# EAGLE board mapleCUx_large_088-Stripped (EAGLE 7.3.0)
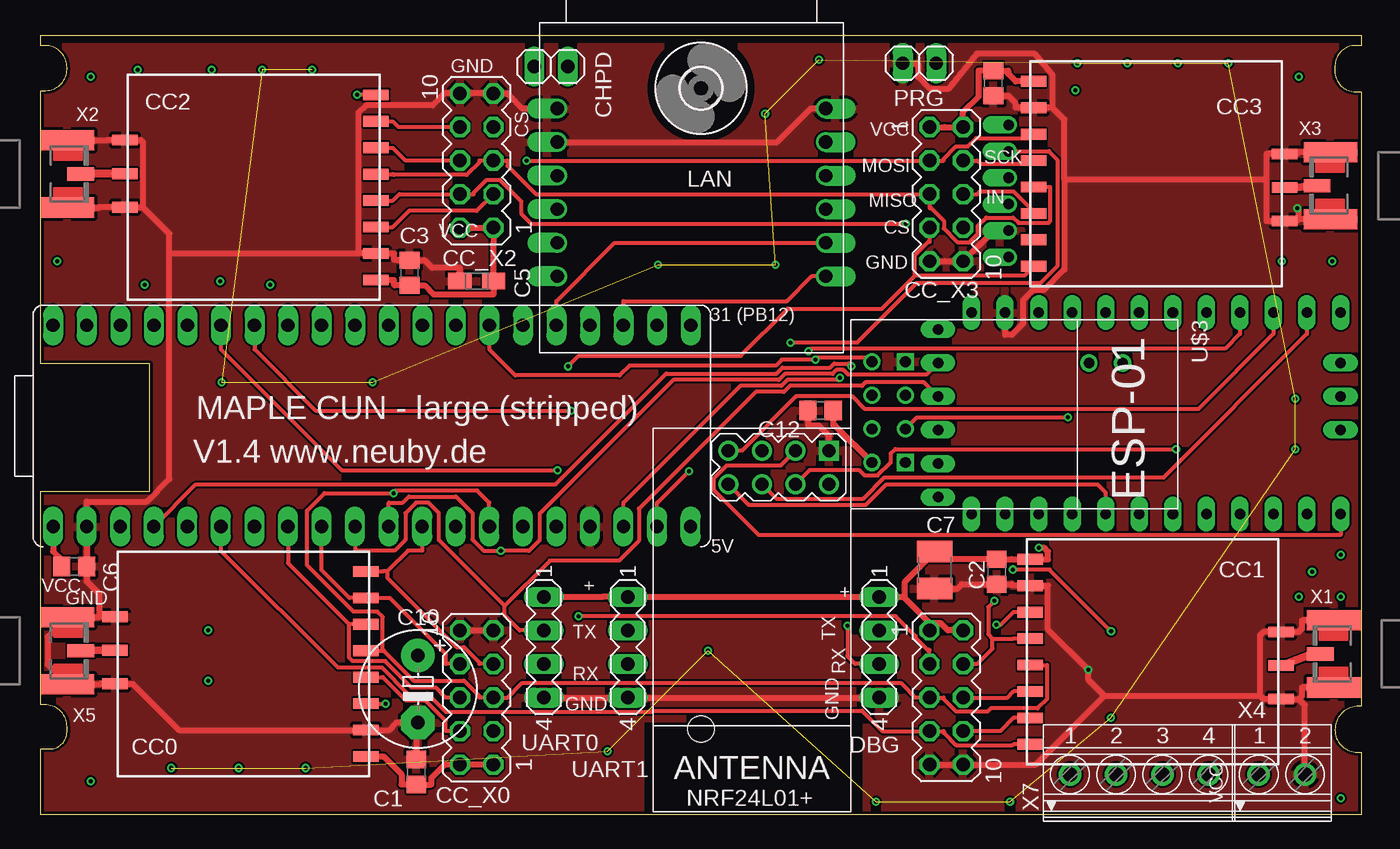
[diagram p0: board, top side]
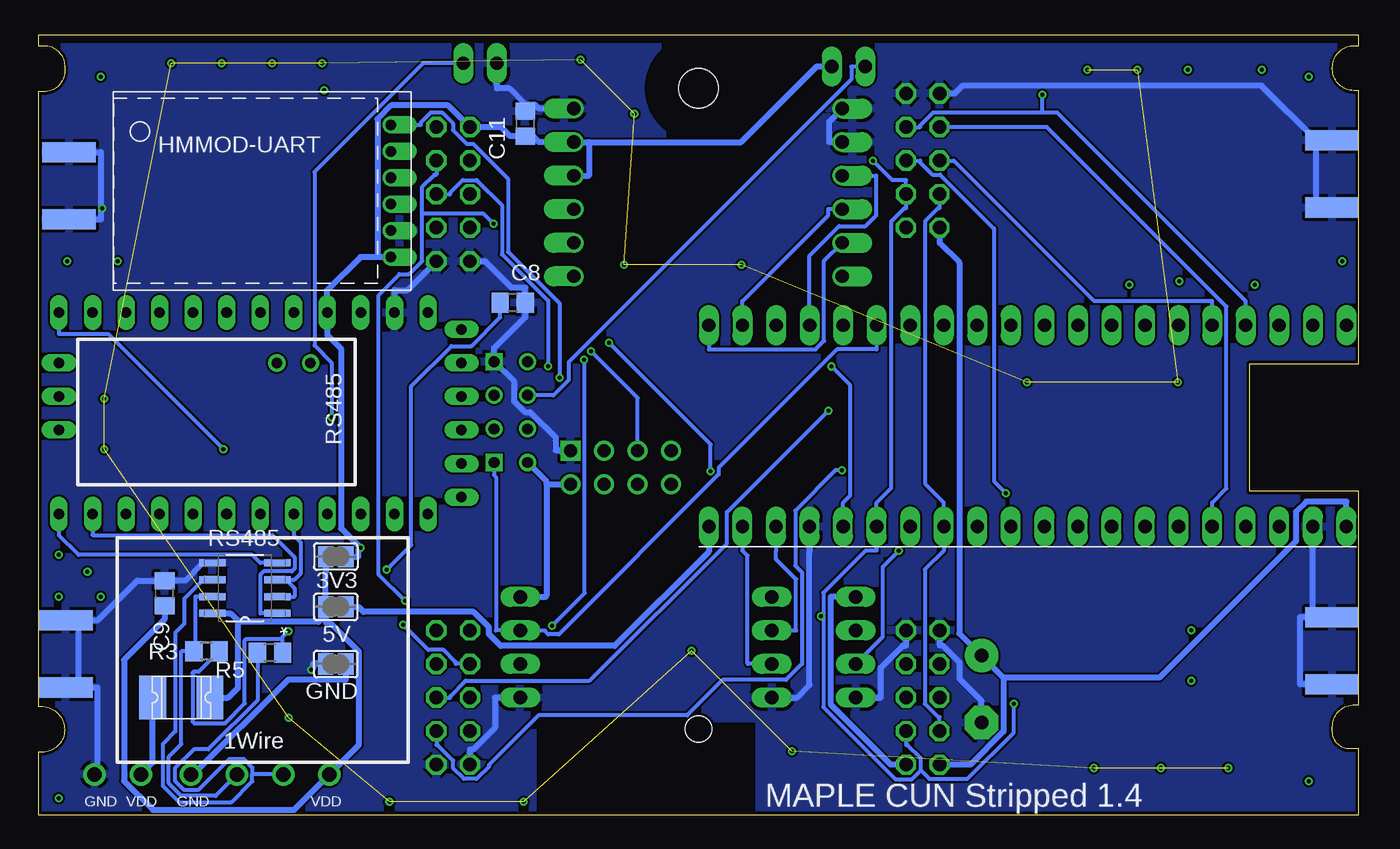
[diagram p1: board, bottom side, seen from below]

Size 100 x 59 mm. Coordinates in mm from the lower left corner, seen from the top.
Outline: 0,0 0,5 0.71,5 arc90 2,6.29 2,6.67 arc90 0.32,8.35 0,8.35 0,24.51 8.26,24.51 8.26,34.16 0,34.16 0,54.83 0.39,54.83 arc90 2,56.44 2,56.57 arc90 0.33,58.24 0,58.24 0,59 100,59 100,58.24 99.54,58.24 arc90 98,56.7 98,56.41 arc90 99.41,54.75 100,54.75 100,8.24 99.8,8.24 arc90 98,6.44 arc90 99.69,4.75 100,4.75 100,0 0,0
Copper layers (1*16): Top 0.035mm / dielectric 1.5mm / Bottom 0.035mm
Design rules "SeeedStudio_2layer_DRU_no_angle_20140221": minimum track width 6mil, minimum drill 12mil, track to track 6mil, track to pad 6mil, pad to pad 6mil, via to via 6mil, smd to smd 0mil, copper to edge 10mil, drill to drill 10mil, minimum pad ring 10mil, minimum via ring 6mil, stop-mask expansion 2mil, vias tented up to drill 100mil, thermal gap 10mil
Net classes: 0 default: width 0.305 mm; 1 PWR: width 0.457 mm
Holes 2 mm at 50,6.5
tRestrict: area 0,58.6 to 100,59; area 45.7,0 to 62.2,7
bRestrict: area 0,58.6 to 100,59; area 0,58.6 to 100,59; area 45.7,0 to 62.2,7

## Footprints (pad centres in the part's own frame; a part is rotated, then mirrored left to right if it is on the bottom)
SJ = smd 1.168 x 1.6: 1 -0.762,0; 2 0.762,0
C0805 = smd 1.3 x 1.5: 1 -0.95,0; 2 0.95,0
R/2012-12W = smd 1.75 x 1.26: + 1.275,0; - -1.275,0
C1210 = smd 1.6 x 2.7: 1 -1.4,0; 2 1.4,0
E5-8,5 = drill 1.016 pad 2.54: + -2.54,0 | drill 1.016 pad 2.54 octagon: - 2.54,0
CC1101_MODULE1_SMD = smd 1.93 x 0.813: ANT 19,5.96; CSN 0,0; GDO0 0,2; GDO2 0,4; GND@0 0,12; GND@1 19,8.5; GND@2 19,3.42; MISO 0,6; MOSI 0,10; SCLK 0,8; VCC 0,14
MA05-2 = drill 1.016 octagon: 1 -5.08,-1.27; 2 -5.08,1.27; 3 -2.54,-1.27; 4 -2.54,1.27; 5 0,-1.27; 6 0,1.27; 7 2.54,-1.27; 8 2.54,1.27; 9 5.08,-1.27; 10 5.08,1.27
1X02 = drill 1.016 long: 1 -1.27,0; 2 1.27,0
MA04-1 = drill 1.016 long: 1 -3.81,0; 2 -1.27,0; 3 1.27,0; 4 3.81,0
1812L = smd 2.03 x 3.3: P$1 -2.16,0; P$2 2.16,0
3,0 = hole 3: 0,0
HM-MOD-UART-DIL = drill 0.8 offset: 1 0,12; 2 0,10; 3 0,8; 4 0,6; 5 0,4; 6 0,2
USR-ES1 = drill 1 pad 1.35 offset: 1 -10.16,5.715; 2 -10.16,3.175; 3 -10.16,0.635; 4 -10.16,-1.905; 5 -10.16,-4.445; 6 -10.16,-6.985; 7 10.16,-6.985; 8 10.16,-4.445; 9 10.16,-1.905; 10 10.16,0.635; 11 10.16,3.175; 12 10.16,5.715
WIRELESS-NRF24L01 = drill 1 square: 1 -12.7,6.35 | drill 1: 2 -10.16,6.35; 3 -12.7,3.81; 4 -10.16,3.81; 5 -12.7,1.27; 6 -10.16,1.27; 7 -12.7,-1.27; 8 -10.16,-1.27
R0805 = smd 1.3 x 1.5: 1 -0.95,0; 2 0.95,0
SOIC127P600X175-8N = smd 1.981 x 0.533: 1 -2.464,1.905; 2 -2.464,0.635; 3 -2.464,-0.635; 4 -2.464,-1.905; 5 2.464,-1.905; 6 2.464,-0.635; 7 2.464,0.635; 8 2.464,1.905
20-DIP = drill 1.016 pad 1.27 long: 1 -24.13,-7.62; 2 -21.59,-7.62; 3 -19.05,-7.62; 4 -16.51,-7.62; 5 -13.97,-7.62; 6 -11.43,-7.62; 7 -8.89,-7.62; 8 -6.35,-7.62; 9 -3.81,-7.62; 10 -1.27,-7.62; 11 1.27,-7.62; 12 3.81,-7.62; 13 6.35,-7.62; 14 8.89,-7.62; 15 11.43,-7.62; 16 13.97,-7.62; 17 16.51,-7.62; 18 19.05,-7.62; 19 21.59,-7.62; 20 24.13,-7.62 | drill 1 pad 1.27 long: 21 24.13,7.62; 22 21.59,7.62; 23 19.05,7.62; 24 16.51,7.62; 25 13.97,7.62; 26 11.43,7.62; 27 8.89,7.62; 28 6.35,7.62; 29 3.81,7.62; 30 1.27,7.62; 31 -1.27,7.62; 32 -3.81,7.62; 33 -6.35,7.62; 34 -8.89,7.62; 35 -11.43,7.62; 36 -13.97,7.62; 37 -16.51,7.62; 38 -19.05,7.62; 39 -21.59,7.62; 40 -24.13,7.62
ABK-PRO-MINI = drill 0.8 long: A0 10.16,-3.81; A1 10.16,-6.35; A2 10.16,-8.89; A3 10.16,-11.43; A6 3.81,-21.59; A7 6.35,-21.59; D2 -5.08,-3.81; D3 -5.08,-6.35; D4 -5.08,-8.89; D5 -5.08,-11.43; D6 -5.08,-13.97; D7 -5.08,-16.51; D8 -5.08,-19.05; D9 -5.08,-21.59; D10 10.16,-21.59; D11 10.16,-19.05; D12 10.16,-16.51; D13 10.16,-13.97; DTR 8.89,8.89; GND 10.16,3.81; GND1 -5.08,-1.27; GND2 -3.81,8.89; GND3 -1.27,8.89; GND4 1.27,-21.59; RAW 10.16,6.35; RST 10.16,1.27; RST1 -5.08,1.27; RX1 -5.08,3.81; RX1-1 3.81,8.89; TX0 -5.08,6.35; TX0-1 6.35,8.89; VCC 10.16,-1.27; VCC1 1.27,8.89 | drill 0.8: A4 6.35,-5.08; A5 6.35,-2.54
ESP01 = drill 0.8: CH_PD -1.285,-8.178; GPIO0 1.255,-5.638; GPIO2 -1.285,-5.638; RST 1.255,-8.178; TX -3.825,-8.178; VCC 3.795,-8.178 | drill 0.8 square: GND -3.825,-5.638; RX 3.795,-5.638
SMA_EDGELAUNCH_UFL = smd 4.064 x 1.524: GND@1 2.032,-2.54; GND@2 2.032,2.54 | smd 4.064 x 1.524 bottom: GND@3 2.032,2.54; GND@4 2.032,-2.54 | smd 2.032 x 1.016: P 3.048,0
1751248 = drill 1.1 pad 1.7: 1 -1.75,-0.1; 2 1.75,-0.1
1751264 = drill 1.1 pad 1.7: 1 -5.25,-0.1; 2 -1.75,-0.1; 3 1.75,-0.1; 4 5.25,-0.1

## Placement (x,y rotation side)
3V3  [SJ]  77.47,19.56 180 bottom
5V  [SJ]  77.47,15.75 0 bottom
C1  22pF  [C0805]  28.45,3.25 270 top
C2  22pF  [C0805]  72.39,18.41 90 top
C3  22pF  [C0805]  27.94,41.04 270 top
C4  22pF  [C0805]  72.14,55.39 90 top
C5  10uF  [R/2012-12W]  33.02,40.4 0 top
C6  22pF  [C0805]  2.54,18.81 0 top
C7  4,7  [C1210]  67.69,18.54 90 top
C8  220p  [C0805]  64.07,38.78 0 bottom
C9  22p  [C0805]  90.42,16.79 270 bottom
C10  100uF  [E5-8,5]  28.57,9.53 270 top
C11  22pF  [C0805]  63.12,52.32 270 bottom
C12  22pF  [C0805]  59.05,30.61 180 top
CC0  CC1101  [CC1101_MODULE1_SMD]  24.64,18.43 180 top
CC1  CC1101_MODULE1SMD  [CC1101_MODULE1_SMD]  74.93,5.35 0 top
CC2  CC1101_MODULE1SMD  [CC1101_MODULE1_SMD]  25.4,54.5 180 top
CC4  CC1101_MODULE1SMD  [CC1101_MODULE1_SMD]  75.18,41.53 0 top
CC_X0  [MA05-2]  33.02,8.89 90 top
CC_X1  [MA05-2]  68.58,8.89 270 top
CC_X2  [MA05-2]  33.02,49.53 90 top
CC_X3  [MA05-2]  68.58,46.99 270 top
CHPD  [1X02]  38.64,56.64 180 top
DBG  [MA04-1]  63.5,12.7 270 top
F1  1812L  [1812L]  89.15,8.89 180 bottom
GND  [SJ]  77.47,11.43 0 bottom
H6  MOUNT-HOLE3.0  [3,0]  50,55 0 top
HMMOD-UART  HM-MOD-UARTDIL  [HM-MOD-UART-DIL]  73.28,54.23 180 bottom
IC2  LAN-USR-ES1  [USR-ES1]  49.28,47.75 0 top
NRF24L01+  NRF24L01+  [WIRELESS-NRF24L01]  53.34,14.88 270 top
PRG  [1X02]  66.55,56.9 180 top
R3  60  [R0805]  87.25,12.39 180 bottom
R5  60  [R0805]  82.44,12.27 180 bottom
RS485  MAX487ECSA+  [SOIC127P600X175-8N]  84.34,17.17 180 bottom
U$1  MAPLEMINI  [20-DIP]  25.08,29.45 180 bottom
U$2  ABK-PRO-MINI  [ABK-PRO-MINI]  76.83,27.87 90 top
U$3  ESP01  [ESP01]  71.12,30.48 270 top
UART0  [MA04-1]  38.1,12.7 270 top
UART1  [MA04-1]  44.45,12.7 270 top
X1  [SMA_EDGELAUNCH_UFL]  99.95,12.19 180 top
X2  [SMA_EDGELAUNCH_UFL]  0,48.51 0 top
X3  [SMA_EDGELAUNCH_UFL]  99.69,47.62 180 top
X4  1751248  [1751248]  93.98,3.17 0 top
X5  [SMA_EDGELAUNCH_UFL]  0,12.43 0 top
X7  1751264  [1751264]  83.19,3.17 0 top

## Library data of the parts
3V3 5V GND = jumper
C1-C12 R3 R5 = rcl
CC0 CC1 CC2 CC4 HMMOD-UART = wireless
CC_X0 CC_X1-CC_X3 DBG UART0 UART1 = con-lstb; OC_FARNELL: unknown; OC_NEWARK: unknown
CHPD PRG = pinhead
F1 = ptc-littlefuse
H6 = holes
IC2 = Martin-Communication
NRF24L01+ = diy-modules
RS485 = Maxim_By_element14_Batch_1; MPN: MAX487ECSA+; OC_FARNELL: 9724532; OC_NEWARK: 68K4803; PACKAGE: SOIC-8; SUPPLIER: Maxim
U$1 = maplemini-small
U$2 = Arduino-clone
U$3 = esp8266modules
X1-X3 X5 = adafruit
X4 = con-phoenix-350; OC_FARNELL: unknown; OC_NEWARK: unknown
X7 = con-phoenix-350; MPN: 1751264; OC_FARNELL: unknown; OC_NEWARK: 10R0934

## Nets
1W: R5.2 RS485.6 X7.2
2W: R3.2 RS485.7 X7.3
+5V [PWR]: 5V.2 U$1.21
CC_CS0: CC0.CSN CC_X0.7 U$1.29
CC_CS1: CC1.CSN CC_X1.7 U$1.35
CC_CS2: CC2.CSN CC_X2.7 U$1.4
CC_CS3: CC4.CSN CC_X3.7 U$1.25
CC_IN_0: CC0.GDO2 CC_X0.6 U$1.33
CC_IN_1: CC1.GDO2 CC_X1.6 U$1.7
CC_IN_2: CC2.GDO2 CC_X2.6 U$1.5
CC_IN_3: CC4.GDO2 CC_X3.6 U$1.37
CC_OUT_0: CC0.GDO0 CC_X0.8 U$1.32
CC_OUT_1: CC1.GDO0 CC_X1.8 U$1.6
CC_OUT_2: CC2.GDO0 CC_X2.8 U$1.36
CE-A: NRF24L01+.3 RS485.4 U$2.D9
CSN-A: NRF24L01+.4 U$2.D10
GD [PWR]: GND.2 X7.4
GND [PWR]: C1.1 C2.1 C3.1 C4.1 C5.- C6.2 C7.1 C8.2 C9.1 C10.- C11.1 C12.2 CC0.GND@0 CC0.GND@1 CC0.GND@2 CC1.GND@0 CC1.GND@1 CC1.GND@2 CC2.GND@0 CC2.GND@1 CC2.GND@2 CC4.GND@0 CC4.GND@1 CC4.GND@2 CC_X0.9 CC_X0.10 CC_X1.9 CC_X1.10 CC_X2.9 CC_X2.10 CC_X3.9 CC_X3.10 DBG.4 GND.1 HMMOD-UART.2 IC2.1 IC2.2 IC2.12 NRF24L01+.1 PRG.2 RS485.5 U$1.24 U$1.39 U$2.GND U$3.GND UART0.4 UART1.4 X1.GND@1 X1.GND@2 X1.GND@3 X1.GND@4 X2.GND@1 X2.GND@2 X2.GND@3 X2.GND@4 X3.GND@1 X3.GND@2 X3.GND@3 X3.GND@4 X4.2 X5.GND@1 X5.GND@2 X5.GND@3 X5.GND@4
IRQ-A: NRF24L01+.8 RS485.2 RS485.3 U$2.D2
MISO1: CC0.MISO CC1.MISO CC2.MISO CC4.MISO CC_X0.5 CC_X1.5 CC_X2.5 CC_X3.5 U$1.27
MISO2: IC2.7 U$1.18
MISO-A: NRF24L01+.7 U$2.D12
MOSI1: CC0.MOSI CC1.MOSI CC2.MOSI CC4.MOSI CC_X0.3 CC_X1.3 CC_X2.3 CC_X3.3 U$1.26
MOSI-A: NRF24L01+.6 U$2.D11
N$1: CC1.ANT X1.P
N$2: CC4.ANT X3.P
N$3: CC2.ANT X2.P
N$4: CC0.ANT X5.P
N$11: PRG.1 U$3.GPIO0
N$17: CHPD.2 U$3.CH_PD
N$21: C8.1 R3.1 R5.1
N$33: IC2.6
N$45 [PWR]: F1.P$2 X4.1
NRESET: U$1.34
RO-A: RS485.1 U$2.D8
RST: IC2.3 U$1.17
RX1: HMMOD-UART.5 U$1.22 UART1.3
RX-MAPLE: U$1.30 U$2.TX0-1 UART0.3
RX_DBG: DBG.3 U$1.14 U$3.TX
SCK1: CC0.SCLK CC1.SCLK CC2.SCLK CC4.SCLK CC_X0.4 CC_X1.4 CC_X2.4 CC_X3.4 U$1.28
SCK2: IC2.4 U$1.19
SCK-A: NRF24L01+.5 U$2.D13
SWCLK/TCK: U$1.10
SWDIO/TMS: U$1.11
SWO/TDO: U$1.8
TDI: U$1.9
TX1: HMMOD-UART.6 U$1.23 UART1.2
TX-MAPLE: U$1.31 U$2.RX1-1 UART0.2
TX_DBG: DBG.2 U$1.15 U$3.RX
VCC [PWR]: 3V3.1 C1.2 C2.2 C3.2 C4.2 C5.+ C6.1 C7.2 C10.+ C11.2 C12.1 CC0.VCC CC1.VCC CC2.VCC CC4.VCC CC_X0.1 CC_X0.2 CC_X1.1 CC_X1.2 CC_X2.1 CC_X2.2 CC_X3.1 CC_X3.2 CHPD.1 DBG.1 HMMOD-UART.1 IC2.10 IC2.11 NRF24L01+.2 U$1.40 U$2.VCC U$3.VCC UART0.1 UART1.1
VDD [PWR]: 3V3.2 5V.1 C9.2 F1.P$1 RS485.8 X7.1
WIZ_CS: IC2.5 U$1.20
WIZ_RST: IC2.8 U$1.16

## Tracks (layer width: path | path; a pad name or v marks a point on that pad's centre or on a via)
1W
  Bottom 0.305: R5.2 83.39,8.68 87.11,4.96 88.2,4.96 89.65,3.52 89.65,2.59 88.96,1.91 87.84,1.91 85.51,4.24 84.44,4.24 83.78,3.58 83.78,3.08 | RS485.6 87.5,17.8 88.92,16.38 88.92,14.48 89.61,13.8 89.61,6.32 90.56,5.37 90.56,2.21 89.32,0.97 85.36,0.97 83.78,2.55 83.78,3.08 | X7.2 83.78,3.08
2W
  Bottom 0.305: 88.67,12.39 88.1,12.96 88.1,16.53 RS485.7 | X7.3 86.56,1.45 89.15,1.45 90.1,2.4 90.1,4.42 89.15,5.37 89.15,12.39 88.67,12.39 | R3.2 88.67,12.39
+5V
  Bottom 0.457: 5V.2 75.74,15.75 75.38,15.38 67.02,15.38 65.86,14.22 65.86,13.69 64.97,12.79 56.36,12.79 49.21,19.94 U$1.21
CC_CS0
  Top 0.305: 26.24,18.43 26.24,17.97 31.5,12.7 32.06,12.7 33.22,11.54 33.22,11.43 CC_X0.7 | 26.24,18.43 27.82,20.02 28.89,20.02 U$1.29 | 26.24,18.43 25.91,18.43 CC0.CSN
CC_CS1
  Top 0.305: U$1.35 13.65,20.02 22.5,11.16 25.82,11.16 27.8,9.19 29.29,9.19 30.68,7.8 46.22,7.8 46.31,7.89 62.19,7.89 63.73,6.35 CC_X1.7 68.38,6.35 68.38,6.22 69.31,5.28 73.59,5.28 73.66,5.35 CC1.CSN
CC_CS2  (via drill 0.3 pad 0.61)
  Top 0.305: v23.96,54.5 24.13,54.5 CC2.CSN
  Bottom 0.305: 23.96,53.18 22.86,53.18 8.57,38.9 U$1.4 | 23.96,53.18 32.22,53.18 33.22,52.18 33.22,52.07 CC_X2.7 | 23.96,53.18 v23.96,54.5
CC_CS3  (via drill 0.3 pad 0.61)
  Top 0.305: v39.94,33.95 40.74,34.75 53.01,34.75 56.58,38.32 63.71,38.32 66.21,40.82 | 66.21,40.82 66.21,42.38 67.22,43.38 67.31,43.38 CC_X3.7 | CC4.CSN 74.48,40.82 66.21,40.82
  Bottom 0.305: U$1.25 39.05,23.64 38.51,24.18 38.51,32.52 v39.94,33.95
CC_IN_0
  Top 0.305: 23.37,14.43 23.37,11.9 23.62,11.64 26.09,11.64 28.09,9.64 29.93,9.64 30.68,8.89 CC_X0.6 | 23.37,14.43 18.73,19.07 18.73,20.02 U$1.33 | CC0.GDO2 23.37,14.43
CC_IN_1  (via drill 0.3 pad 0.61)
  Top 0.305: v40.16,30.61 20.82,30.61 16.19,35.24 U$1.7 | CC1.GDO2 73.66,9.35 73.2,8.89 CC_X1.6
  Bottom 0.305: v40.16,30.61 47.85,22.92 47.85,20.55 58.24,10.16 67.62,10.16 68.78,9 68.78,8.89 CC_X1.6
CC_IN_2
  Top 0.305: CC2.GDO2 26.67,50.5 27.64,49.53 CC_X2.6
  Bottom 0.305: CC_X2.6 30.68,49.53 20.05,38.9 11.11,38.9 U$1.5
CC_IN_3  (via drill 0.3 pad 0.61)
  Top 0.305: U$1.37 11.76,25.01 38.98,25.01 47.36,33.4 55.7,33.4 56.16,33.85 59.78,33.85 60.09,34.16 61.2,34.16 v61.39,33.97 | CC_X3.6 70.92,46.99 71.13,47.2 73.67,47.2 75.18,45.68 CC4.GDO2
  Bottom 0.305: v61.39,33.97 61.39,38.94 64.89,42.44 64.89,46.15 66.8,48.06 67.85,48.06 68.78,47.12 68.78,46.99 CC_X3.6
CC_OUT_0
  Top 0.305: U$1.32 21.27,18.53 23.37,16.43 CC0.GDO0 26.44,16.43 30.68,12.18 30.68,11.43 CC_X0.8
CC_OUT_1  (via drill 0.3 pad 0.61)
  Top 0.305: U$1.6 13.65,35.24 22.79,26.1 v39.16,26.1 | CC_X1.8 72.66,6.35 73.66,7.35 CC1.GDO0
  Bottom 0.305: CC_X1.8 69.85,5.28 69.74,5.28 68.58,4.12 68.58,3.55 67.75,2.73 66.81,2.73 65.87,3.67 65.87,3.8 62.12,7.54 50.87,7.54 48.2,10.22 43.37,10.22 42.16,11.43 42.16,18.37 42.67,18.88 42.67,23.04 39.62,26.1 v39.16,26.1
CC_OUT_2
  Top 0.305: CC2.GDO0 26.67,52.5 27.1,52.07 CC_X2.8
  Bottom 0.305: U$1.36 11.11,23.64 10.03,24.73 10.03,38.47 23.63,52.07 CC_X2.8
CE-A
  Top 0.305: U$2.D9 98.42,21.18 54.38,21.18 50.97,24.58 50.97,25.47 51.97,26.46 56.04,26.46 NRF24L01+.3
  Bottom 0.305: U$2.D9 98.42,21.18 96.93,19.68 83.78,19.68 83.18,19.07 RS485.4
CSN-A  (via drill 0.3 pad 0.61)
  Top 0.305: NRF24L01+.4 58.24,26.12 61.96,26.12 62.38,25.69 63.38,25.69 64.37,26.69 64.37,27.36 64.71,27.69 v85.97,27.69
  Bottom 0.305: v85.97,27.69 94.69,36.42 98.42,36.42 U$2.D10
GD
  Bottom 0.457: X7.4 88.24,3.08 81.07,10.25 76.71,10.25 GND.2
GND  (via drill 0.3 pad 0.61)
  Top 0.457: 9.75,42.5 24.05,42.5 | 24.05,42.5 CC2.GND@0 26.75,42.5 26.75,42.05 26.81,41.99 C3.1 29.07,41.99 29.64,41.41 31.75,41.41 C5.- | 24.05,42.5 24.05,53.13 24.63,53.71 29.71,53.71 30.61,54.61 CC_X2.10 CC_X2.9 35.43,54.61 35.43,54.51 36.47,53.47 IC2.1 | 9.75,42.5 9.75,44 7.75,46 | 9.75,42.5 9.75,25.44 8.03,23.72 3.49,23.72 U$1.39 3.49,21.52 3.49,19.94 C6.2 3.49,17.68 4.45,16.73 4.45,15.01 | C12.2 58.1,29.48 58.92,29.48 59.69,28.71 NRF24L01+.1 | UART0.4 UART1.4 DBG.4 | 77.52,48.07 77.52,41.29 75.95,39.72 75.14,39.72 74.38,38.96 74.38,37.19 73.53,36.34 73.03,36.34 U$2.GND | IC2.12 58.3,53.47 55.76,50.93 IC2.2 | 92.84,48.07 92.84,50.03 CC4.GND@1 95.11,50.03 95.25,50.16 X3.GND@1 | 92.84,48.07 92.84,44.95 CC4.GND@2 95.11,44.95 95.25,45.09 | 92.84,48.07 77.52,48.07 | 77.52,48.07 77.52,52.63 76.61,53.53 | 76.61,53.53 CC4.GND@0 73.84,53.53 73.84,53.87 73.27,54.44 C4.1 | 76.61,53.53 76.61,56.01 75.23,57.65 70.92,57.65 68.77,54.98 67.33,54.98 66.42,55.9 66.42,56.9 PRG.2 | 95.25,45.09 95.25,45.8 v95.14,45.9 | HMMOD-UART.2 72.17,44.23 CC_X3.10 68.45,41.91 CC_X3.9 | 92.34,9.01 92.58,8.77 CC1.GND@2 95.28,8.77 | 80.54,9.01 92.34,9.01 | 92.34,9.01 92.34,13.61 92.58,13.85 CC1.GND@1 95.28,13.85 95.5,14.08 95.5,14.73 X1.GND@1 | 80.54,9.01 75.34,3.81 CC_X1.10 CC_X1.9 | 80.54,9.01 79.31,10.24 v79.31,10.98 76.28,14.02 76.28,17.35 CC1.GND@0 73.58,17.35 73.52,17.41 73.52,17.46 C2.1 69.75,17.46 69.42,17.14 C7.1 | CC0.GND@2 4.45,15.01 | 4.45,15.01 4.45,14.97 X5.GND@2 0.53,13.47 0.53,11.39 X5.GND@1 4.45,9.89 4.49,9.93 CC0.GND@1 6.98,9.93 10.48,6.43 CC0.GND@0 26.37,6.43 26.92,6.99 27.75,6.99
  Top 0.457: 7.75,46 CC2.GND@1 4.47,46 4.45,45.97 X2.GND@4 | X4.2 95.73,8.32 95.28,8.77 | 27.75,6.99 28.45,6.29 C1.1 | C10.- 27.75,6.99 | 7.75,46 7.75,50.93 7.59,51.08 CC2.GND@2 5.05,51.08 5.03,51.05 4.45,51.05 X2.GND@2 | CC_X0.10 CC_X0.9 | X1.GND@2 95.5,9.65 95.5,9 95.28,8.77 | X3.GND@2 95.25,45.09
  Bottom 0.457: CC_X1.9 67.31,4.95 67.07,4.95 65.41,6.62 65.41,8.89 DBG.4 | NRF24L01+.1 60.83,27.57 60.83,28.57 62.74,30.5 63.15,30.5 63.98,31.32 63.98,32.81 65.48,34.32 | U$3.GND 65.48,34.32 | 65.48,34.32 65.48,34.82 65.48,35.34 63.18,37.65 63.12,37.65 C8.2 63.12,39.34 63.12,39.91 64.17,39.91 66.17,41.91 CC_X3.9 | 63.12,53.79 64.32,54.99 65.28,54.99 PRG.2 | 63.12,53.79 62.4,53.79 62.08,53.47 IC2.12 | 95.25,45.9 95.25,45.09 X3.GND@2 | 95.25,45.9 95.25,50.16 X3.GND@1 | 95.25,45.9 v95.14,45.9 | U$2.GND 73.03,39.72 72.04,39.72 CC_X3.10 | 96.96,14.73 96,14.73 95.5,14.73 92.5,17.74 C9.1 88.83,17.74 87.49,19.07 87.15,19.07 RS485.5 | X1.GND@1 96.96,14.73 | 96.96,9.65 95.5,9.65 95.5,3.3 X4.2 | X1.GND@2 96.96,9.65 | 96.96,14.73 96.96,9.65 | v79.31,10.98 79.2,11.1 79.2,11.43 GND.1 | IC2.1 40.1,52.48 40.1,50.93 IC2.2 | 3.24,51.05 3.24,45.97 X2.GND@4 | CC_X2.10 30.61,54.61 30.01,55.2 7.39,55.2 3.24,51.05 | X2.GND@2 3.24,51.05 | C11.1 63.12,53.79 | CC_X0.10 31.75,12.83 31.51,12.83 30.23,11.54 30.23,10.29 28.57,8.64 C10.- | U$1.24 41.59,19.94 41.59,9.84 42.55,8.89 UART1.4 | CC_X0.9 34.29,12.83 34.53,12.83 36.2,11.16 36.2,8.89 UART0.4 | 3.24,14.97 3.49,15.22 U$1.39 | 3.24,14.97 4.45,14.97 4.45,9.89 X5.GND@1 | X5.GND@2 3.24,14.97
  pour Bottom: 0,0 0,58.42 100.33,58.42 100.33,0
  pour Top: 0,0 0,58.42 100.33,58.42 100.33,0
IRQ-A
  Top 0.305: NRF24L01+.8 53.62,23.49 62.5,23.49 64.05,25.03 80.02,25.03 80.64,24.4 U$2.D2
  Bottom 0.305: RS485.2 80.58,16.53 80.58,17.16 81.23,17.8 | 81.23,17.8 80.58,17.8 80.13,18.26 80.13,20.66 80.64,21.18 U$2.D2 | RS485.3 81.23,17.8
MISO1  (via drill 0.3 pad 0.61)
  Top 0.305: 25.91,12.43 25.98,12.43 28.25,10.16 32.06,10.16 33.22,9 33.22,8.89 CC_X0.5 35.36,8.89 36.47,10 65.13,10 66.24,8.89 CC_X1.5 67.84,8.89 68.38,8.89 68.38,8.78 69.33,7.82 71.69,7.82 71.93,8.06 75.49,8.06 76.2,8.78 76.2,11.35 CC1.MISO | 25.91,12.43 25.91,14.99 25.5,15.4 23.7,15.4 20.18,18.91 20.18,23.04 21.5,24.36 v26.71,24.36 26.91,24.55 33.06,24.55 33.97,23.64 U$1.27 | CC4.MISO 76.45,47.53 76.45,44.96 76.3,44.81 74.06,44.81 73.65,45.21 71.59,45.21 70.96,44.58 70.96,43.99 70.33,43.35 69.43,43.35 68.38,44.4 68.38,44.99 67.44,45.92 67.31,45.92 CC_X3.5 37.5,46.99 35.36,49.13 35.36,49.53 CC_X2.5 33.76,49.53 33.22,49.53 33.22,49.4 32.27,48.44 26.73,48.44 26.67,48.5 CC2.MISO | CC0.MISO 25.91,12.43
  Bottom 0.305: CC_X2.5 33.22,49.53 33.22,49.4 32.29,48.46 31.71,48.46 27.62,44.37 27.62,25.27 v26.71,24.36
MISO2
  Top 0.305: IC2.7 58.38,40.77 56.51,38.9 44.13,38.9 U$1.18
MISO-A
  Top 0.305: U$2.D12 93.34,36.42 87.65,30.72 62.42,30.72 61.46,31.67 57.21,31.67 53.11,27.57 NRF24L01+.7
MOSI1  (via drill 0.3 pad 0.61)
  Top 0.305: CC0.MOSI 25.91,8.43 25.94,8.4 v26.14,8.4 | v40.72,15.04 64.74,15.04 66.24,13.54 66.24,13.41 67.15,12.5 67.31,12.5 CC_X1.3 | CC2.MOSI 26.67,44.5 27.89,45.72 33.02,45.72 CC_X2.3 | v36.79,49.53 CC_X3.3 68.38,49.53 68.38,49.66 69.31,50.6 70.2,50.6 70.84,51.23 74.88,51.23 CC4.MOSI | CC1.MOSI 73.66,15.35 72.71,14.4 v72.38,14.4
  Bottom 0.305: 33.18,3.38 33.18,4.28 34.18,5.28 34.29,5.28 CC_X0.3 | 40.55,15.04 40.55,8.16 35.09,2.7 33.86,2.7 33.18,3.38 | 33.18,3.38 32.52,2.73 29.64,2.73 26.14,6.23 v26.14,8.4 | 40.55,15.04 v40.72,15.04 | 40.55,15.04 40.55,16.82 37.35,20.02 36.51,20.02 U$1.26 36.51,22.13 36.51,23.64 35.4,24.75 35.4,44.92 34.4,45.92 34.29,45.92 CC_X2.3 34.29,48.06 35.32,48.06 v36.79,49.53 | CC_X1.3 68.38,11.43 68.38,11.56 69.31,12.5 70.47,12.5 v72.38,14.4
MOSI-A
  Top 0.305: NRF24L01+.6 55.7,23.95 62.28,23.95 63.89,25.56 85.03,25.56 95.89,36.42 U$2.D11
N$1
  Top 0.61: CC1.ANT 96.27,12.19 X1.P
N$2
  Top 0.61: CC4.ANT X3.P
N$3
  Top 0.61: CC2.ANT X2.P
N$4
  Top 0.61: CC0.ANT X5.P
N$6  (via drill 0.3 pad 0.61)
  other vias: 3.81,55.88
N$7  (via drill 0.3 pad 0.61)
  other vias: 1.27,41.91
N$9  (via drill 0.3 pad 0.61)
  other vias: 3.81,2.54
N$11  (via drill 0.3 pad 0.61)
  Top 0.305: U$3.GPIO0 66.36,30.1 v77.78,30.1
  Bottom 0.305: PRG.1 70.86,56.9 79.08,48.68 79.08,35.53 77.78,34.24 v77.78,30.1
N$13  (via drill 0.3 pad 0.61)
  other vias: 7.37,56.39
N$14  (via drill 0.3 pad 0.61)
  other vias: 12.95,56.39
N$16  (via drill 0.3 pad 0.61)
  other vias: 95.25,55.88
N$17
  Bottom 0.305: U$3.CH_PD 60.98,31.77 59.84,32.91 59.84,34.27 38.44,55.67 38.44,56.64 CHPD.2
N$21  (via drill 0.3 pad 0.61)
  Top 0.305: v81.05,13.92 76.39,18.58 v73.61,18.58
  Bottom 0.305: 81.49,13.33 81.49,13.48 v81.05,13.92 | R3.1 87.84,10.85 88.21,10.85 88.31,10.74 88.31,7.09 88.16,6.93 85.85,6.93 84.35,8.44 84.35,13.21 84.24,13.33 81.49,13.33 | v73.61,18.58 71.75,20.43 71.75,32.44 68.7,35.49 67.2,35.49 65.02,37.67 C8.1 | R5.1 81.49,13.33
N$22  (via drill 0.3 pad 0.61)
  other vias: 7.87,40.13
N$23  (via drill 0.3 pad 0.61)
  other vias: 13.59,40.39
N$25  (via drill 0.3 pad 0.61)
  other vias: 17.4,40.13
N$28  (via drill 0.3 pad 0.61)
  other vias: 12.7,13.97
N$31  (via drill 0.3 pad 0.61)
  other vias: 78.36,54.86
N$35  (via drill 0.3 pad 0.61)
  other vias: 98.42,1.27
N$37  (via drill 0.3 pad 0.61)  (21 unrouted)
  other vias: 16.76,56.39 20.57,56.39 58.93,57.15 54.86,53.09 78.49,56.9 82.3,56.9 86.11,56.9 89.92,56.9 95,31.5 95,27.69 81.03,7.37 73.41,1.02 63.25,1.02 50.55,12.45 55.63,41.66 42.93,4.83 14.99,3.56 9.91,3.56 20.07,3.56 13.72,32.77 25.15,32.77 46.74,41.66
N$38  (via drill 0.3 pad 0.61)
  other vias: 12.7,10.16
N$39  (via drill 0.3 pad 0.61)
  other vias: 93.98,41.91
N$40  (via drill 0.3 pad 0.61)
  other vias: 98.42,16.51
N$41  (via drill 0.3 pad 0.61)
  other vias: 95.25,16.51
N$42  (via drill 0.3 pad 0.61)
  other vias: 98.42,19.68
N$43  (via drill 0.3 pad 0.61)
  other vias: 96.27,18.41
N$44  (via drill 0.3 pad 0.61)
  other vias: 97.79,41.91
N$45
  Bottom 0.457: X4.1 91.31,3.99 F1.P$2
RO-A
  Bottom 0.305: U$2.D8 95.89,21.18 82.25,21.18 80.58,19.51 80.58,18.65 80.8,18.44 82.93,18.44 83.18,18.2 83.18,15.26 RS485.1
RST
  Bottom 0.305: IC2.3 36.55,48.39 36.55,45.38 37.35,44.58 39.36,44.58 41.59,42.34 U$1.17
RX1  (via drill 0.3 pad 0.61)
  Top 0.305: HMMOD-UART.5 76.35,50.24 76.98,49.61 76.98,41.52 75.72,40.25 66.31,40.25 61.82,35.76 v56.79,35.76 | U$1.22 46.67,23.64 46.7,23.64 v49.09,26.03
  Bottom 0.305: v49.09,26.03 49.09,28.05 v56.79,35.76 | U$1.22 46.67,20.02 46.28,19.62 46.28,11.43 UART1.3
RX-MAPLE  (via drill 0.3 pad 0.61)
  Top 0.305: U$2.TX0-1 67.05,33.33 61.15,33.33 60.78,33.7 60.27,33.7 59.97,33.39 56.35,33.39 55.9,32.94 47.91,32.94 37.78,22.81 37.78,20.8 36.98,19.99 v34.85,19.99 33.55,19.99 32.7,20.84 32.7,22.85 31.46,24.1 27.87,24.1 27.41,23.64 26.35,23.64 U$1.30
  Bottom 0.305: UART0.3 36.05,13.47 36.05,18.79 v34.85,19.99
RX_DBG  (via drill 0.3 pad 0.61)
  Top 0.305: U$3.TX 62.63,34.61 58.83,34.61 v58.68,34.46 56.12,34.46 55.67,34.01 44.59,34.01 43.85,33.27 35.94,33.27 33.97,35.24 U$1.14 | DBG.3 61.67,11.43 61.09,12.02 v61.09,14.33
  Bottom 0.305: v61.09,14.33 58.61,16.8 58.61,34.4 v58.68,34.46
SCK1  (via drill 0.3 pad 0.61)
  Top 0.305: v65.53,44.76 37.14,44.76 36.38,45.51 36.38,46.45 34.76,48.07 33.77,48.07 32.82,47.12 32.82,46.99 CC_X2.4 27.16,46.99 26.67,46.5 CC2.SCLK | 72.08,13.35 73.66,13.35 CC1.SCLK | 72.08,13.35 72.08,12.59 70.92,11.43 CC_X1.4 | v72.23,16.21 71.75,15.73 71.75,13.68 72.08,13.35 | CC0.SCLK 25.91,10.43 27.68,8.66 29.16,8.66 30.68,7.14 30.68,6.35 CC_X0.4 | CC_X3.4 70.92,49.53 71.18,49.27 74.92,49.27 CC4.SCLK
  Bottom 0.305: 70.92,45.54 70.92,47.53 69.98,48.46 69.85,48.46 CC_X3.4 | v72.23,16.21 74.22,18.2 74.22,39.34 72.63,40.93 71.92,40.93 70.92,41.92 70.92,45.54 | 70.92,45.54 66.31,45.54 v65.53,44.76 | CC_X0.4 31.75,7.42 31.86,7.42 32.86,8.42 32.86,18.59 31.43,20.02 U$1.28 31.43,22.13 31.43,23.64 32.82,25.02 32.82,44.97 31.86,45.92 31.75,45.92 CC_X2.4
SCK2
  Bottom 0.305: IC2.4 40.17,45.85 40.17,45.4 46.67,38.9 U$1.19
SCK-A  (via drill 0.3 pad 0.61)
  Top 0.305: v58.13,35.09 58.34,35.3 89.69,35.3 90.81,36.42 U$2.D13
  Bottom 0.305: NRF24L01+.5 54.61,31.57 v58.13,35.09
TX1  (via drill 0.3 pad 0.61)
  Top 0.305: v60.53,33.09 60.37,32.94 56.54,32.94 56.08,32.48 52.98,32.48 44.13,23.64 U$1.23
  Bottom 0.305: v60.53,33.09 60.53,38.72 64.43,42.62 64.43,48.17 67.06,50.8 67.56,50.8 68.6,51.84 68.6,52.34 69.43,53.18 70.26,53.18 71.01,52.43 71.01,52.23 HMMOD-UART.6 | U$1.23 44.13,20.02 44.13,19.37 42.62,17.86 42.62,13.97 UART1.2
TX-MAPLE
  Top 0.305: U$2.RX1-1 66.88,32.74 62.46,32.74 62.2,32.48 56.73,32.48 56.27,32.02 54.15,32.02 45.31,23.18 45.31,20.75 43.81,19.25 38.57,19.25 35.14,15.82 | 35.14,15.82 30.16,20.8 30.16,22.85 29.38,23.64 28.43,23.64 27.62,22.84 27.62,20.84 26.8,20.02 23.81,20.02 U$1.31 | 35.14,15.82 35.14,15.1 36.27,13.97 UART0.2 | 35.14,15.82
TX_DBG
  Bottom 0.305: U$3.RX 65.48,25.73 65.33,25.57 65.33,13.97 DBG.2 61.67,13.97 61.38,13.68 60.58,13.68 48.48,25.77 48.48,26.28 39.52,35.24 36.51,35.24 U$1.15
VCC  (via drill 0.3 pad 0.61)
  Top 0.457: C12.1 60.01,29.48 60.15,29.48 U$3.VCC | U$1.40 0.95,19.94 1.59,19.3 C6.1 | CC_X0.1 CC_X0.2 30.61,3.81 29.58,2.78 29.58,2.31 C1.2 27.32,2.31 27.32,3.1 25.98,4.43 CC0.VCC | CC4.VCC 73.84,55.53 73.27,56.1 73.27,56.34 C4.2 71.97,56.34 71,56.34 71,54.37 69.85,53.21 CC_X3.2 68.45,52.07 CC_X3.1 | v75.6,20.22 75.99,20.22 76.28,19.94 76.28,19.35 CC1.VCC 73.54,19.35 73.52,19.36 C2.2 71.26,19.36 71.24,19.35 67.69,19.35 | 67.69,19.35 67.16,19.35 65.41,17.6 65.41,16.51 | 65.41,16.51 DBG.1 UART1.1 42.55,16.51 40.01,16.51 UART0.1 | 65.41,16.51 65.41,16.45 67.31,14.54 | CC_X1.2 68.71,13.97 68.14,14.54 67.31,14.54 | CC_X1.1 67.31,14.54 | C7.2 67.69,19.35 | CC2.VCC 26.75,40.5 26.75,40.15 26.81,40.09 C3.2 29.07,40.09 29.77,39.39 34.3,39.39 C5.+ 34.3,40.76 34.3,41.41 34.3,43.3 34.29,43.31 CC_X2.1 CC_X2.2
  Bottom 0.457: U$3.VCC 61.51,25.25 61.51,25.04 | CC_X0.1 35.43,3.81 40.01,8.38 40.01,16.51 UART0.1 | 58.3,50.93 46.77,50.93 41.05,56.64 CHPD.1 | 58.3,50.93 58.3,48.39 IC2.10 | CC_X2.2 31.75,43.31 30.26,41.82 30.26,13.75 C10.+ 26.9,10.39 | 74.31,42.23 74.31,52.66 73.26,53.71 68.95,53.71 CC_X3.1 64.95,52.07 64.25,51.37 C11.2 62.53,51.37 62.08,50.93 IC2.11 58.87,50.93 58.3,50.93 | 74.31,42.23 75.59,42.23 78.11,39.72 U$2.VCC 78.11,37.6 78.11,36.34 77.07,35.3 77.07,21.7 v75.6,20.22 75.74,20.08 75.74,19.56 3V3.1 | HMMOD-UART.1 74.31,42.23 | U$1.40 0.95,23.72 4,23.72 4.76,22.95 4.76,20.73 15.1,10.39 26.9,10.39 | 26.9,10.39 26.9,6.32 29.41,3.81 CC_X0.2 | 61.51,25.04 61.51,16.6 61.59,16.51 DBG.1 | 61.51,25.04 NRF24L01+.2
VDD
  Bottom 0.457: F1.P$1 85.6,8.89 84.88,9.61 84.88,14.52 84.79,14.62 | 84.79,14.62 85.44,15.26 RS485.8 | 78.23,15.16 78.77,14.62 84.79,14.62 | 78.23,15.16 78.23,14.57 77.91,14.57 75.71,12.37 75.71,5.3 X7.1 80.62,0.39 91.31,0.39 93.49,2.57 93.49,11.74 90.42,14.81 C9.2 | 78.23,15.16 5V.1 78.23,18.38 3V3.2
WIZ_CS
  Bottom 0.305: U$1.20 49.21,35.24 41.13,35.24 40.49,35.88 40.49,41.93 IC2.5
WIZ_RST
  Top 0.305: U$1.16 39.05,38.9 43.46,43.31 IC2.8

## Text on the board
tNames: GND | CS | CC3 | VCC | MOSI | SCK | LAN | MISO | IN | VCC | CS | GND | 31 (PB12) | MAPLE CUN - large (stripped) | V1.4 www.neuby.de | 5V | VCC | + | GND | + | TX | TX | RX | RX | GND | GND | VCC
bNames: RS485 | 1Wire | MAPLE CUN Stripped 1.4 | VDD | GND | VDD | GND